# Altium PCB I3_PFE_FULLFILL_SATTLER_IR_2.PCBDOC
Units mm, origin at the board's own origin, x right, y up, seen from the top; angles counter-clockwise.
Board outline 67.8 x 46.5 mm, 2 copper layers (TopLayer, BottomLayer); 24 components, 16 nets, 110 pads, 23 vias.
Unrouted connection lines stored in the file: 35.
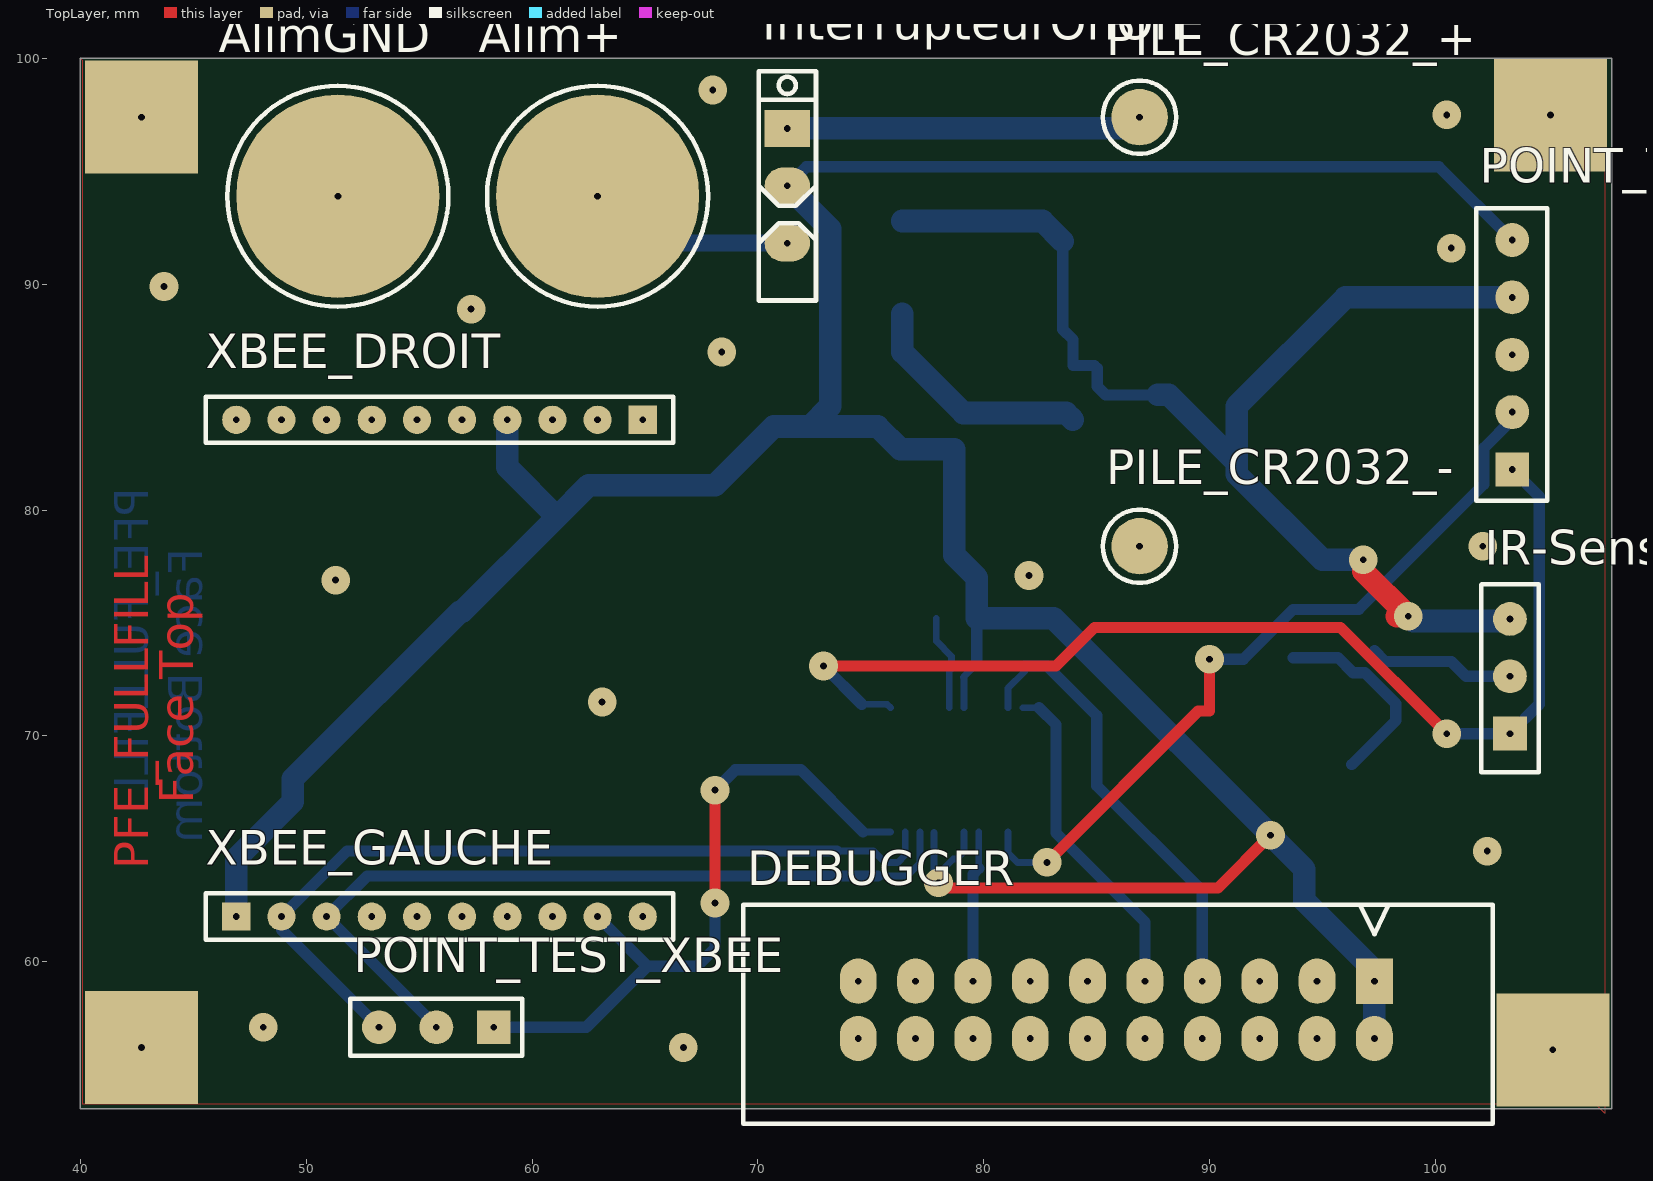
[diagram p0: TopLayer view]
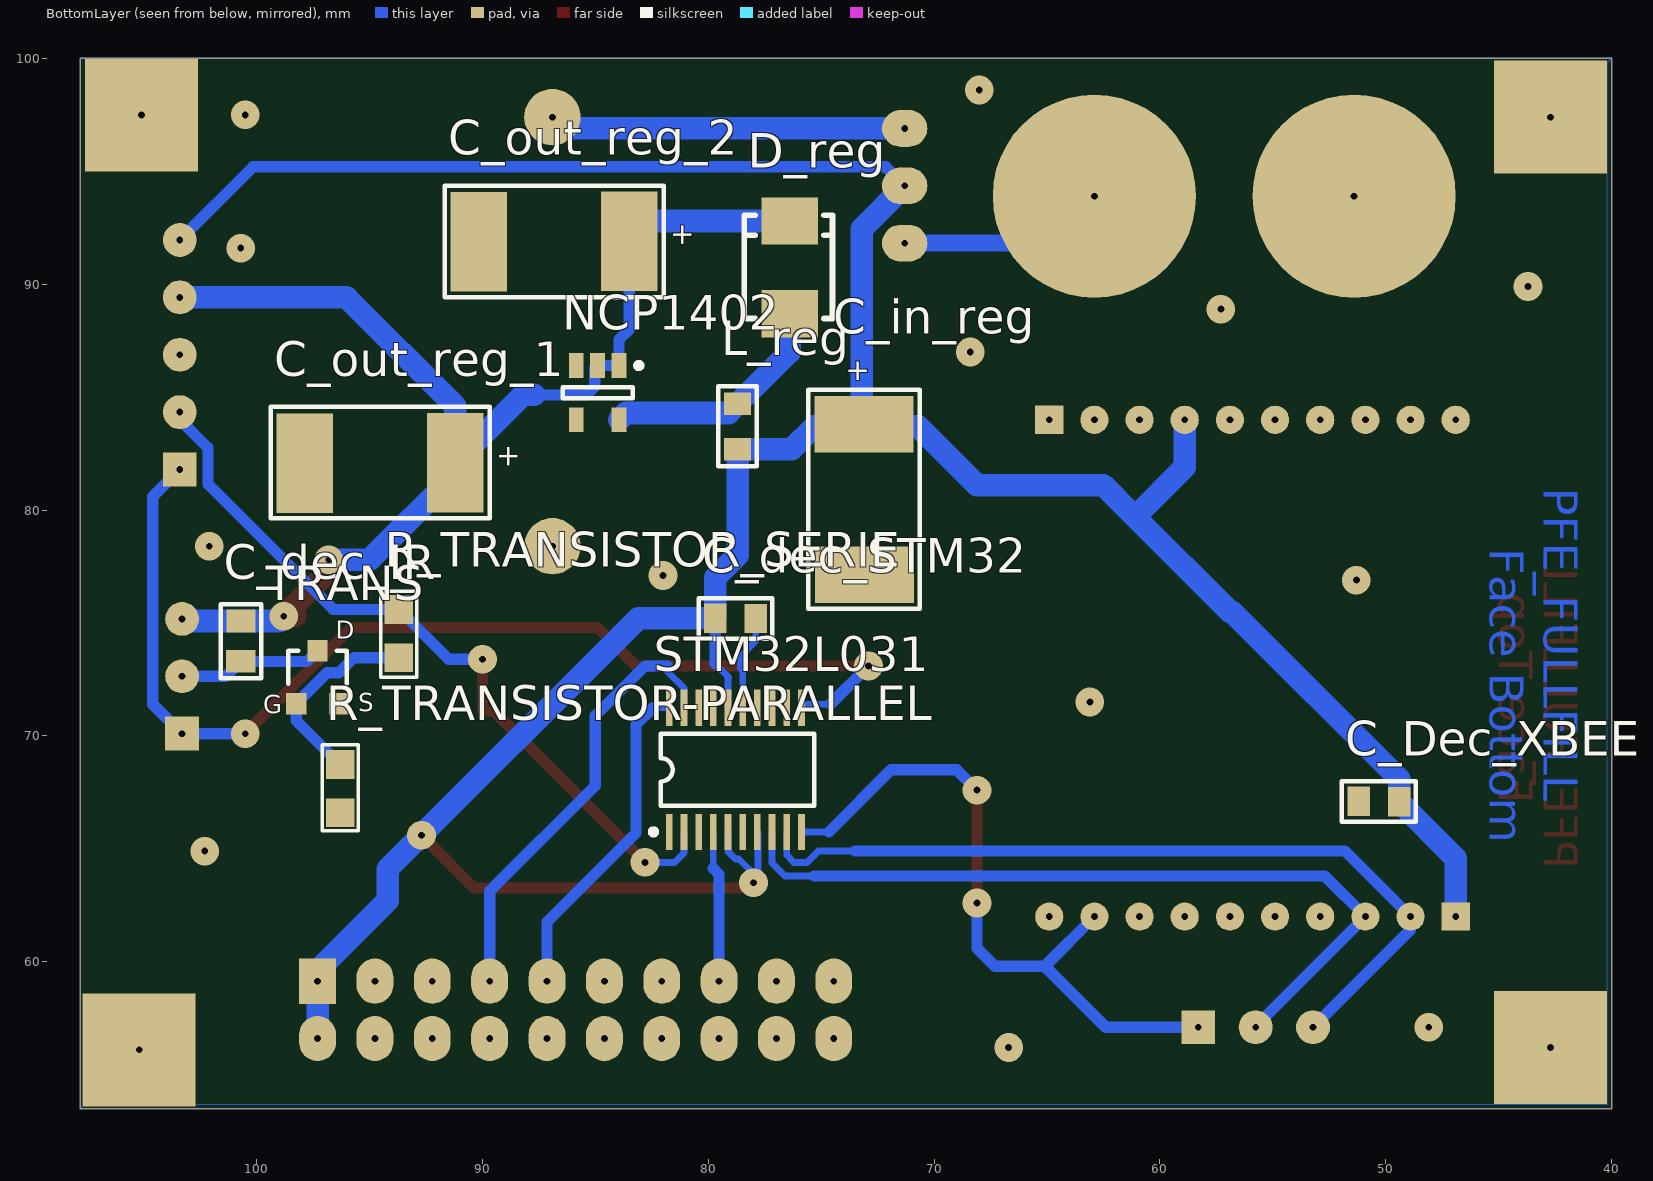
[diagram p1: BottomLayer view, seen from below]
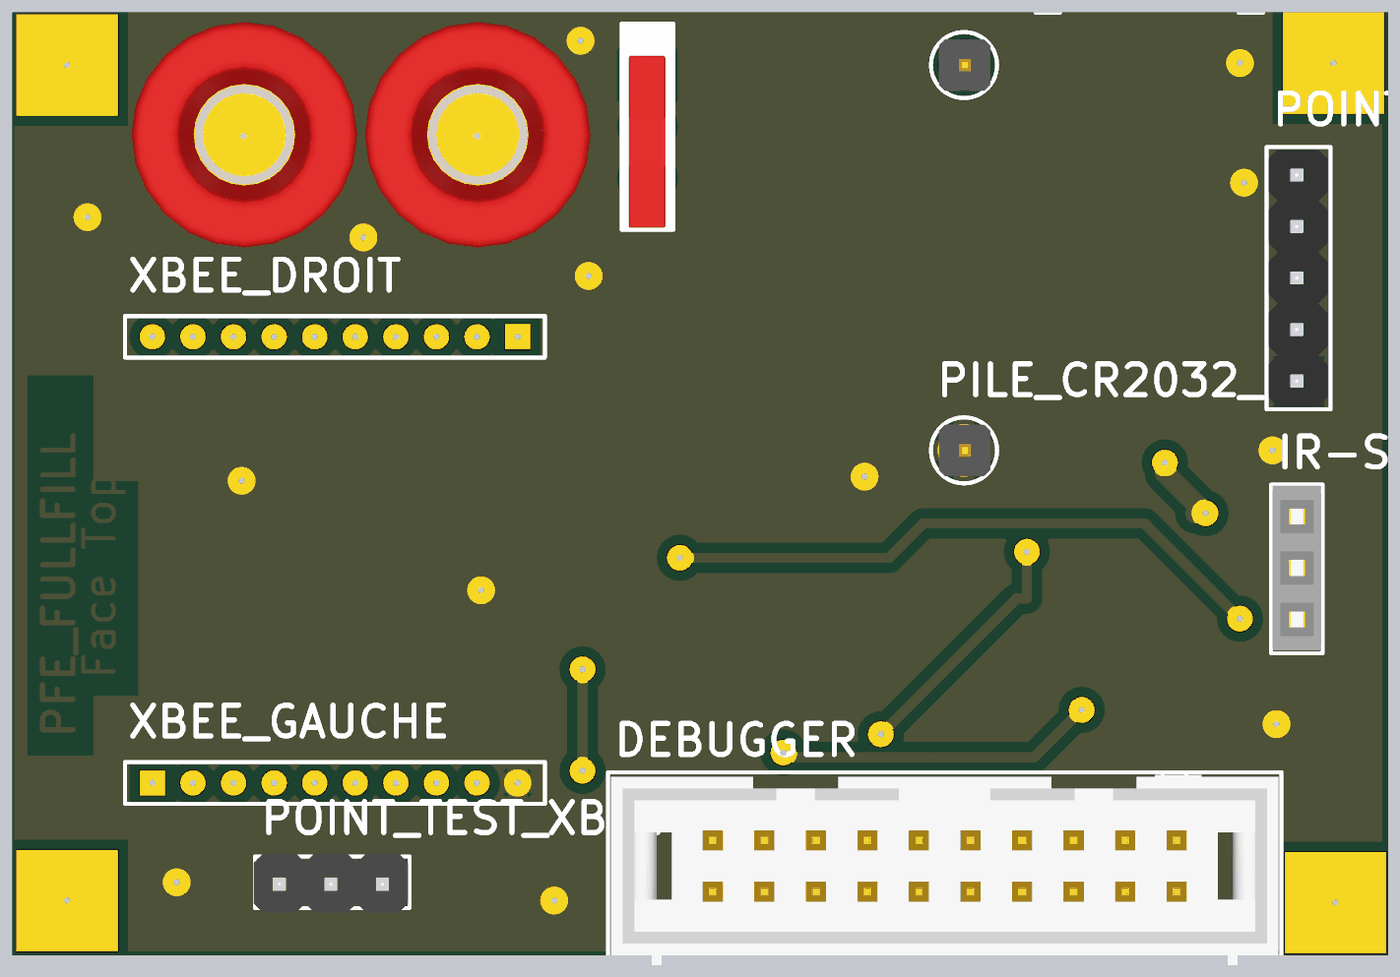
[diagram p2: 3D render of the assembled board from above, using the file's embedded part models]
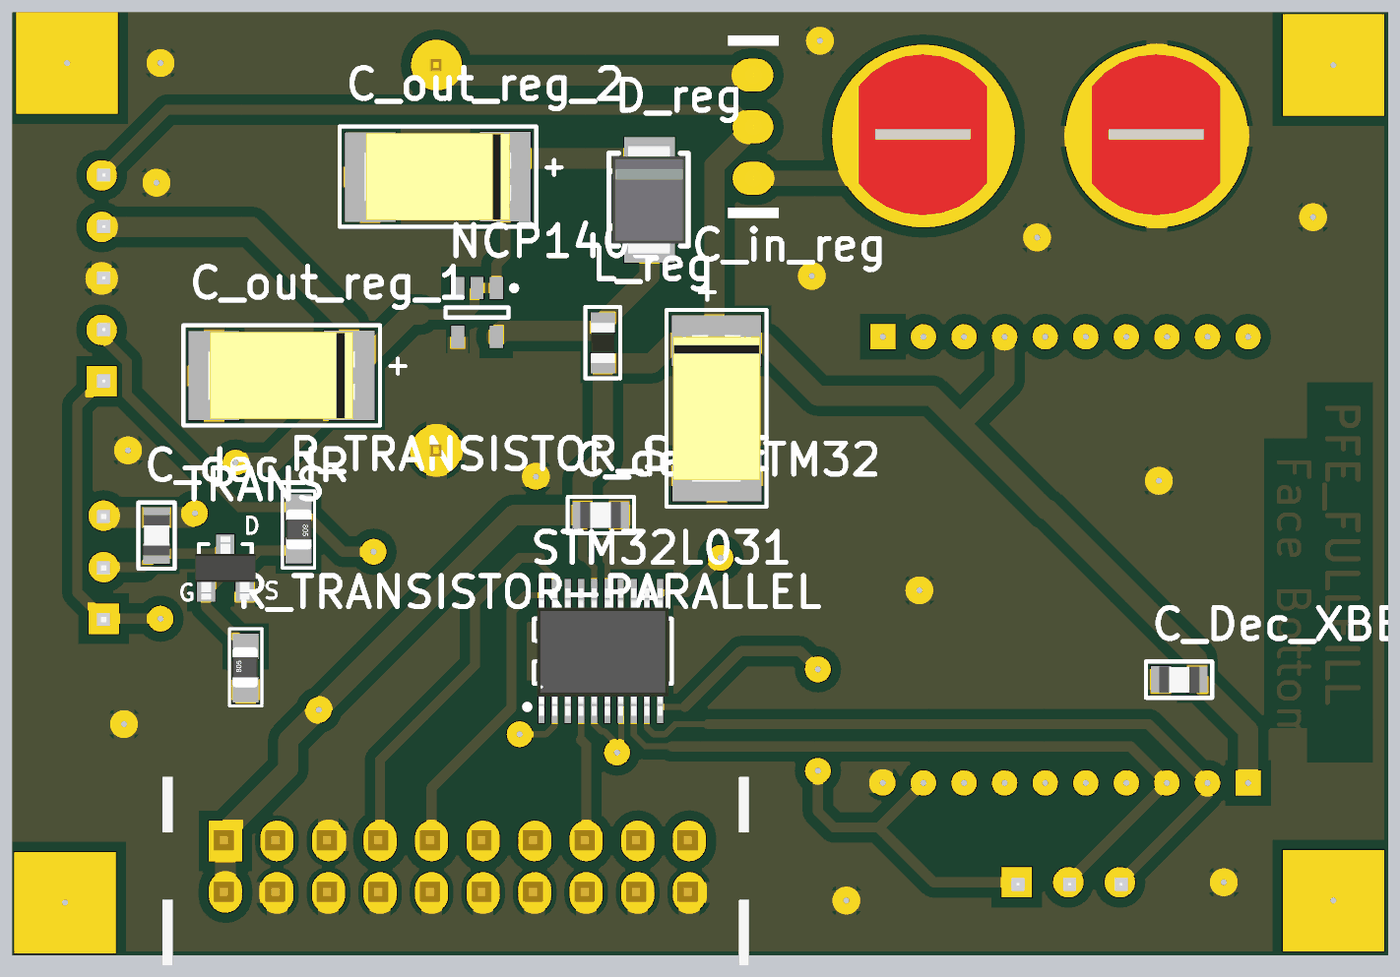
[diagram p3: 3D render of the assembled board from below, using the file's embedded part models]

## Layer stack, top to bottom
TopSolder: solder mask 0.0102, Solder Resist, Dk 3.5
TopLayer: signal copper 0.0356
Dielectric1: core 0.32, FR-4, Dk 4.8
BottomLayer: signal copper 0.0356
BottomSolder: solder mask 0.0102, Solder Resist, Dk 3.5

## Board outline
40,53.5 40,100 107.8,100 107.8,53.5

## Design rules (kind name [scope] priority, off if disabled: settings)
Clearance Clearance_7 [InNamedPolygon('GND-Top')] p1: gap=0.5
Clearance Clearance_6 [InNamedPolygon('GND-Bottom')] p2: gap=0.5
Clearance Clearance_5 [InNamedPolygon('GND-Bottom')] p3: gap=0.5
Clearance Clearance_4 [InNamedPolygon('topGND')] p4 off: gap=0.5
Clearance Clearance_3 [InNamedPolygon('BottomGND')] p5 off: gap=0.5
Clearance Clearance_2 [InNamedPolygon('BottomGND')] p6 off: gap=0.5
Clearance Clearance_1 [InNamedPolygon('BottomGND')] p7 off: gap=0
Clearance [All] p8: gap=0.25
FabricationTestPointUsage TestPointUsage [All] p1: valid=0 allowmultiple=FALSE
FabricationTestpoint Testpoint [All] p1: side=3 testpointundercomponent=TRUE minsize=1.016 maxsize=2.54 preferedsize=1.524 minholesize=0.508 maxholesize=1.016 preferedholesize=0.813 testpointgrid=0.025 allowsidetop=TRUE allowsidebottom=TRUE usegrid=TRUE gridtolerance=0
PlaneConnect [All] p1: planeconnectstyle=Relief reliefexpansion=0.5 reliefentries=4 reliefconductorwidth=1.016 reliefairgap=0.5
PolygonConnect [All] p1: connectstyle=Relief reliefconductorwidth=1.016 reliefentries=4 polygonreliefangle="90 Angle" airgapwidth=0.254
RoutingVias [All] p1: holewidth=0.6 width=1.524 viastyle="Through Hole" minholewidth=0.6 minwidth=1.524 maxholewidth=0.6 maxwidth=1.524
ShortCircuit [All] p1: allowed=TRUE
SilkToSolderMaskClearance SilkscreenOverComponentPads [IsPad] p1: minsilkscreentomaskgap=0.254 clearancetoexposedcopper=TRUE
SolderMaskExpansion [All] p1: expansion=0.051
Width Width_Power [(InNet('GND') OR InNet('+5V')  OR InNet('+3V3') OR InNet('VCC'))] p1: maxlimit=3 minlimit=0.3 preferedwidth=1.5
Width [All] p2: maxlimit=3 minlimit=0.03 preferedwidth=0.5
24 further rules are at their usual default settings.

## Components (designator, comment, footprint, x,y, rotation, side; value= is the part's Value field where it differs from the comment)
Alim+ "DOUILLE BANANE 4mm" DOUILLE_BANANE_4mm 62.9,93.9 r90 top
AlimGND "DOUILLE BANANE 4mm" DOUILLE_BANANE_4mm 51.4,93.9 r90 top
C_dec_IR "CMS_0805" CONDENSATEUR_CMS_0805 100.7,73.3 r90 bottom
C_dec_STM32 "CMS_0805" CONDENSATEUR_CMS_0805 77.9,75.2 r0 bottom
C_Dec_XBEE "CMS_0805" CONDENSATEUR_CMS_0805 51.2,67.1 r180 bottom
C_in_reg "CMS_POLARISE_TANTALE_7343-31" CONDENSATEUR_CMS_POLARISE_TANTALE_D/7343-31 73.1,83.8 r270 bottom
C_out_reg_1 "CMS_POLARISE_TANTALE_7343-31" CONDENSATEUR_CMS_POLARISE_TANTALE_D/7343-31 91.2,82.1 r0 bottom
C_out_reg_2 "CMS_POLARISE_TANTALE_7343-31" CONDENSATEUR_CMS_POLARISE_TANTALE_D/7343-31 83.5,91.9 r0 bottom
D_reg "DIODE_CMS_SCHOTTKY_SMB : MBRS130LT3" DIODE_CMS_SMB 76.4,92.8 r270 bottom
DEBUGGER "HE10/20_MALE_DROIT_BAS_PROFIL" HE10/20_M_D_BP 97.3,56.6 r180 top
InterrupteurOnOff "INTERRUPTEUR_UNIPOLAIRE_DROIT_GLISSIERE" INTER_UNIPOL_DROIT_GLISS 71.3,96.9 r270 top
IR-Sensor "BARRETTE 3 CONTACTS 1 RANGEE FEMELLE DROITE" BARRETTE_3_F_D 103.3,70.1 r90 top
L_reg "INDUCTANCE_CMS_0805" INDUCTANCE_CMS_0805 78.7,82.7 r90 bottom
NCP1402 "MCP73831T-2DCI/OT" SOT-23-OT5_N 84.9,85.2 r270 bottom
PILE_CR2032_+ "POINT_TEST" POINT_TEST 86.9,97.4 r0 top
PILE_CR2032_- "POINT_TEST" POINT_TEST 86.9,78.4 r0 top
POINT_TEST_ALIM_CAPTEUR "BARRETTE_5 CONTACTS_1 RANGEE_MALE_DROITE" BARRETTE_5_M_D 103.4,81.8 r90 top
POINT_TEST_XBEE "BARRETTE 3 CONTACTS 1 RANGEE MALE DROITE" BARRETTE_3_M_D 58.3,57.1 r180 top
R_TRANSISTOR-PARALLEL "RESISTANCE_CMS_0805" RESISTANCE_CMS_0805 96.3,66.6 r90 bottom
R_TRANSISTOR_SERIE "RESISTANCE_CMS_0805" RESISTANCE_CMS_0805 93.7,75.6 r270 bottom
STM32L031 "MSP430F1121AIPW_TSSOP20" TSSOP20_PAS=0.65_LARG=6.4_LONG=6.5 78.8,68.5 r180 bottom
TRANS "TRANSISTOR_MOSFET-N_SOT23_GSD" TRANSISTOR_MOSFET-N_SOT23_GSD 97.3,72.6 r180 bottom
XBEE_DROIT "MMS-110-01-L-SV" SMTC-MMS-110-01-X-SV 64.9,84 r180 top
XBEE_GAUCHE "MMS-110-01-L-SV" SMTC-MMS-110-01-X-SV 46.9,62 r0 top

## Footprints (in the part's own frame and the unit in brackets; to place one, negate y for a bottom-side part, rotate by r counter-clockwise, add the part's x,y. Pads: shape width x height; smd on the part's side, far side on the other; paste and mask are expansions set on the pad)
BARRETTE_3_F_D [mm] "BARRETTE 3 CONTACTS ; 1 RANGEE ; DROITE ; FEMELLE ; ESPACEMENT BROCHES = 2.54 mm"
  rect 1.5x1.5 hole 0.3: 1(0,0)
  round 1.5 hole 0.3: 2(2.54,0) 3(5.08,0)
  silkscreen extent -1.7,-1.27 6.61,1.27, body extent -1.56,-1.21 6.56,1.2, height 8.5
BARRETTE_3_M_D [mm] "BARRETTE 3 CONTACTS ; 1 RANGEE ; DROITE ; MALE ; ESPACEMENT BROCHES = 2.54 mm"
  rect 1.5x1.5 hole 0.3: 1(0,0)
  round 1.5 hole 0.3: 2(2.54,0) 3(5.08,0)
  silkscreen extent -1.27,-1.27 6.35,1.27, body extent -1.21,-1.42 6.41,1.5, height 8.61
BARRETTE_5_M_D [mm] "BARRETTE 5 CONTACTS ; 1 RANGEE ; DROITE ; MALE ; ESPACEMENT BROCHES = 2.54 mm"
  rect 1.5x1.5 hole 0.3: 1(0,0)
  round 1.5 hole 0.3: 2(2.54,0) 3(5.08,0) 4(7.62,0) 5(10.16,0)
  silkscreen extent -1.38,-1.56 11.56,1.59, body extent -1.25,-1.42 11.45,1.5, height 8.51
CONDENSATEUR_CMS_0805 [mm] "CONDENSATEUR CMS 0805 ; DIMENSIONS : 2mm x 1.25mm"
  rect 1x1.3 smd: 1(0,0) 2(1.79,-0.01)
  silkscreen extent -0.74,-0.9 2.53,0.89, body extent -0.09,-0.67 1.91,0.64, height 0.73
CONDENSATEUR_CMS_POLARISE_TANTALE_D/7343-31 [mm] "CONDENSATEUR CMS POLARISE TANTALE BOITIER D ; DIMENSIONS : 7.3mm x 4.3mm"
  rect 2.5x4.4 smd: 1(0,0) 2(6.66,0.02)
  silkscreen extent -1.52,-2.47 8.17,2.47, body extent -0.32,-2.14 6.98,2.16, height 2.81
DIODE_CMS_SMB [mm] "DIODE CMS SMB ; DIMENSIONS : 5.4mm x 3.6mm ; ESPACEMENT BROCHES : 4.15mm"
  rect 2.1x2.5 smd: 1(4.1,0) 2(0,0)
  silkscreen extent -0.25,-2 4.32,1.91, body extent -0.65,-1.82 4.75,1.78, height 2.3
DOUILLE_BANANE_4mm [mm] "DOUILLE BANANE ; DIAMETRE PASSAGE CONTACT = 4 mm ; DIAMETRE PERCAGE = 6 mm"
  round 9 hole 0.3: 1(0,0)
  silkscreen extent -4.89,-4.89 4.89,4.89, body extent -5.5,-5.6 5.63,5.53, height 4.79
HE10/20_M_D_BP [mm] "HE10 ; 20 CONTACTS ; MALE ; DROIT; BAS PROFIL ; ESPACEMENTS BROCHES = 2.54 mm"
  rect 1.63x2 hole 0.3: 1(0,-2.54)
  oval 1.63x2 hole 0.3: 2(0,0) 3(2.54,-2.54) 4(2.54,0) 5(5.08,-2.54) 6(5.08,0) 7(7.62,-2.54) 8(7.62,0) 9(10.16,-2.54) 10(10.16,0) 11(12.7,-2.54) 12(12.7,0) 13(15.24,-2.54) 14(15.24,0) 15(17.78,-2.54) 16(17.78,0) 17(20.32,-2.54) 18(20.32,0) 19(22.86,-2.54) 20(22.86,0)
  silkscreen extent -5.24,-5.93 27.94,3.77, body extent -5.1,-5.8 27.8,3.6, height 8.8
INDUCTANCE_CMS_0805 [mm] "INDUCTANCE CMS 0805 ; DIMENSIONS : 2mm x 1.25mm"
  rect 1x1.2 smd: 1(0,0) 2(2,0)
  silkscreen extent -0.75,-0.85 2.78,0.86, body extent 0,-0.6 2,0.6, height 0.95
INTER_UNIPOL_DROIT_GLISS [mil] "Switch; Slide; SPDT; Pin Spacing=2.54mm"
  rect 64x79 / inner oval 64x79 / far side oval 64x79 hole 11.81: 1(0,0)
  oval 64x79 hole 11.81: 2(100,0) 3(200,0)
  silkscreen extent -100,-50 300,50, body extent -97,-50 297,48, height 291
POINT_TEST [mm] "PASTILLE TRAVERSANTE ; DIAMETRE = 2.5 mm ; DIAMETRE PERCAGE = 1.3 mm"
  round 2.5 hole 0.3: 1(0,0)
  silkscreen extent -1.63,-1.62 1.63,1.62, body extent -1.24,-1.27 1.3,1.27, height 5.94
RESISTANCE_CMS_0805 [mil] "RESISTANCE CMS 0805 ; DIMENSIONS : 2mm x 1.25mm"
  rect 50x50 smd: 1(0,0) 2(84,0)
  silkscreen extent -31,-31 118,31, body extent 4,-24 83,26, height 31
SMTC-MMS-110-01-X-SV [mm] "Through Hole Box Connector Strip Assembly, 1x10 Pins, Vertical, 2mm Pitch, Female"
  rect 1.25x1.25 hole 0.3: 1(0,0)
  round 1.25 hole 0.3: 2(2,0) 3(4,0) 4(6,0) 5(8,0) 6(10,0) 7(12,0) 8(14,0) 9(16,0) 10(18,0)
  silkscreen extent -1.35,-1.02 19.35,1.02, body extent -1.28,-1 19.28,1, height 4.44
SOT-23-OT5_N [mm] "SOT23, 5-Leads, Body 2.9x1.6mm, Pitch 0.95mm, Lead Span 2.7mm, IPC Medium Density"
  rect 1.1x0.65 smd: 1(-1.2,0.95) 2(-1.2,0) 3(-1.2,-0.95) 4(1.2,-0.95) 5(1.2,0.95)
  silkscreen extent -1.32,-1.55 0.25,1.95, body extent -0.9,-1.55 0.9,1.55, height 1.45
TRANSISTOR_MOSFET-N_SOT23_GSD [mm] "SOT23 ; DIMENSIONS : 3.0mm x 2.5 mm"
  rect 0.9x0.95 smd: 1(-0.95,-1.175) 2(0.95,-1.175) 3(0,1.175)
  silkscreen extent -1.3,-0.3 1.3,1.18, body extent -1.5,-1.57 1.5,1.57, height 1.1
TSSOP20_PAS=0.65_LARG=6.4_LONG=6.5 [mm] "Thin Shrink Small Outline Plastic Packages ; 20 Leads ; Body Width = 4.4 mm ; Pitch = 0.65 mm"
  rect 0.3x1.6 smd: 1(-2.925,-2.75) 2(-2.275,-2.75) 3(-1.625,-2.75) 4(-0.975,-2.75) 5(-0.325,-2.75) 6(0.325,-2.75) 7(0.975,-2.75) 8(1.625,-2.75) 9(2.275,-2.75) 10(2.925,-2.75) 11(2.925,2.75) 12(2.275,2.75) 13(1.625,2.75) 14(0.975,2.75) 15(0.325,2.75) 16(-0.325,2.75) 17(-0.975,2.75) 18(-1.625,2.75) 19(-2.275,2.75) 20(-2.925,2.75)
  silkscreen extent -3.75,-2.87 3.5,1.6, body extent -3.15,-3.18 3.35,3.1, height 1.09

## Part data
Alim+ AlimGND: library part DOUILLE_BANANE_4mm, "DOUILLE BANANE 4 mm"
C_dec_IR C_dec_STM32 C_Dec_XBEE: library part CONDENSATEUR_CMS_CER_0805, "CONDENSATEUR CMS CERAMIQUE 0805"
C_in_reg C_out_reg_1 C_out_reg_2: library part CONDENSATEUR_CMS_POL_TANT_D_7343-31, "CONDENSATEUR CMS POLARISE TANTALE BOITIER D/7343-31"
D_reg: "DIODE CMS SCHOTTKY SMB : MBRS130LT3"
DEBUGGER: "EMBASE HE10/20 MALE DROIT BAS PROFIL"
InterrupteurOnOff: "INTERRUPTEUR UNIPOLAIRE DROIT A GLISSIERE"
IR-Sensor: library part "BARRETTE_3 CONTACTS_1 RANGEE_FEMELLE_DROITE"
L_reg: "INDUCTANCE CMS 0805"
NCP1402: "Miniature Single-Cell, Fully Integrated Li-Ion, Li-Polymer Charge Management Controller, 4.2V, 5-Pin SOT-23, Industrial Temperature, Tape and Reel"
PILE_CR2032_+ PILE_CR2032_-: "POINT TEST"
POINT_TEST_ALIM_CAPTEUR: "BARRETTE 5 CONTACTS 1 RANGEE MALE DROITE"
POINT_TEST_XBEE: library part "BARRETTE_3 CONTACTS_1 RANGEE_MALE_DROITE"
R_TRANSISTOR-PARALLEL R_TRANSISTOR_SERIE: "RESISTANCE CMS 0805"
STM32L031: "MICROCONTROLEUR FLASH - 16BITS - TSSOP20"
TRANS: "TRANSISTOR MOSFET CANAL N BOITIER SOT23_GSD"
XBEE_DROIT XBEE_GAUCHE: "Tiger Claw(TM) Socket Strip, Through-hole, Vertical, -55 to 125 degC, 2 mm Pitch, 10-Pin, Female, RoHS"

## Free pads (board coordinates)
  rect 5x5 hole 0.3: 1(42.7,97.4) 2(42.7,56.2) 3(105.2,56.1) 4(105.1,97.5)

## Via types
v1: diameter 1.27, hole 0.3, TopLayer to BottomLayer, 23 vias

## Nets (pads, with @x,y where several pads share a name; then routed paths per layer and width w, separated by ;. In a path a pad name is that pad's centre, name@x,y a point inside that pad or via, vN(x,y) a via of type N, cw(c..) or ccw(c..) an arc to the next point about the centre after c; other vN are vias at no path point)
3V: C_dec_STM32.2 C_Dec_XBEE.2 C_in_reg.1 DEBUGGER.1 DEBUGGER.2 InterrupteurOnOff.2 L_reg.1 POINT_TEST_ALIM_CAPTEUR.5 STM32L031.5 STM32L031.7 STM32L031.16 XBEE_DROIT.4 XBEE_GAUCHE.1 | length 155
  TopLayer w0.5: v1(78,63.5) 78.235,63.265 90.365,63.265 v1(92.7,65.6)
  BottomLayer w0.3: STM32L031.7@77.8,65.725 v1@77.8,63.7 ; v1(78,63.5) 77.8,63.5 v1@77.8,63.7 ; STM32L031.5 79.125,64.884 78.791,64.55 78.65,64.55 v1@77.8,63.7 ; STM32L031.16 79.125,72.575 79.1,72.6 79.69,73.19
  BottomLayer w0.5: InterrupteurOnOff.2 72.14,95.2 100.16,95.2 POINT_TEST_ALIM_CAPTEUR.5 ; 79.69,73.19 C_dec_STM32.2
  BottomLayer w1: XBEE_GAUCHE.1 46.9,64.58 C_Dec_XBEE.2 49.41,68.11 56.8,75.5 56.9,75.5 61.1,79.7 ; XBEE_DROIT.4 58.9,81.9 61.1,79.7 ; InterrupteurOnOff.2 73.2,92.46 73.2,84.6 C_in_reg.1@72.3,83.7 ; DEBUGGER.2 DEBUGGER.1 97.3,59.6 94.2,62.7 94.2,64.1 83.09,75.21 C_dec_STM32.2 79.69,77.01 78.7,78 L_reg.1 76.3,82.7 75.3,83.7 C_in_reg.1@72.3,83.7 ; 61.1,79.7 62.5,81.1 68.1,81.1 70.7,83.7 C_in_reg.1@72.3,83.7
5V: C_dec_IR.2 C_out_reg_1.1 C_out_reg_2.1 D_reg.2 IR-Sensor.3 NCP1402.1 NCP1402.2 POINT_TEST_ALIM_CAPTEUR.4 | length 55.3
  TopLayer w1: v1(96.8,77.8) 96.8,77.3 v1(98.8,75.3) v1@98.3,75.3
  BottomLayer w0.5: C_out_reg_2.1 83.5,88 83.95,87.55 NCP1402.1 NCP1402.2 ; NCP1402.2@85.025,86.275 85.025,85.475 85.4,85.1 87.7,85.1
  BottomLayer w1: D_reg.2 82.6,92.8 C_out_reg_2.1 ; 87.7,85.1 88.2,85.1 C_out_reg_1.1 ; v1(96.8,77.8) 95,77.8 91.2,81.6 C_out_reg_1.1 ; v1(98.8,75.3) 99.01,75.09 C_dec_IR.2 103.21,75.09 IR-Sensor.3 ; POINT_TEST_ALIM_CAPTEUR.4 96.02,89.42 91.2,84.6 C_out_reg_1.1
GND: AlimGND.1 C_dec_STM32.1 C_Dec_XBEE.1 C_in_reg.2 C_out_reg_1.2 C_out_reg_2.2 DEBUGGER.3 DEBUGGER.4 DEBUGGER.5 DEBUGGER.6 DEBUGGER.8 DEBUGGER.10 DEBUGGER.12 DEBUGGER.14 DEBUGGER.16 DEBUGGER.18 DEBUGGER.20 NCP1402.4 PILE_CR2032_-.1 POINT_TEST_ALIM_CAPTEUR.3 R_TRANSISTOR-PARALLEL.1 STM32L031.15 TRANS.2 XBEE_GAUCHE.10 | length 4.3
  BottomLayer w0.3: C_dec_STM32.1 77.9,74.2 78.575,73.525 78.575,72.994 78.475,72.894 STM32L031.15
  other v1: 66.7,56.2 48.1,57.1 102.3,64.9 63.1,71.5 51.3,76.9 82,77.1 102.1,78.4 68.4,87 57.3,88.9 43.7,89.9 100.7,91.6 100.5,97.5 68,98.6
GPIO_SENSOR_IN: POINT_TEST_ALIM_CAPTEUR.2 R_TRANSISTOR_SERIE.1 STM32L031.2 | length 34.2
  TopLayer w0.5: v1(82.8,64.4) 89.5,71.1 90,71.1 v1(90,73.4)
  BottomLayer w0.3: STM32L031.2 81.075,64.825 81.5,64.4 v1(82.8,64.4)
  BottomLayer w0.5: v1(90,73.4) 91.5,73.4 R_TRANSISTOR_SERIE.1 96.6,75.6 102.15,81.15 102.15,82.757 103.4,84.007 POINT_TEST_ALIM_CAPTEUR.2
GPIO_SENSOR_OUT: IR-Sensor.1 POINT_TEST_ALIM_CAPTEUR.1 STM32L031.11 | length 49.5
  TopLayer w0.5: v1(72.9,73.1) 83.2,73.1 84.9,74.8 95.8,74.8 v1(100.5,70.1)
  BottomLayer w0.3: 74.6,71.4 75.725,71.4 STM32L031.11
  BottomLayer w0.5: v1(72.9,73.1) 74.6,71.4 ; v1(100.5,70.1) IR-Sensor.1 104.6,71.4 104.6,80.6 POINT_TEST_ALIM_CAPTEUR.1
NetAlim+_1: Alim+.1 InterrupteurOnOff.3 | length 9.3
  BottomLayer w0.75: Alim+.1 64.98,91.82 InterrupteurOnOff.3
NetC_dec_IR_1: C_dec_IR.1 IR-Sensor.2 TRANS.3 | length 6.5
  BottomLayer w0.5: TRANS.3 97.775,73.3 C_dec_IR.1 101.36,72.64 IR-Sensor.2
NetD_reg_1: D_reg.1 L_reg.2 NCP1402.5 | length 10.5
  BottomLayer w1: D_reg.1 76.4,87 L_reg.2 79.1,84.3 83.65,84.3 NCP1402.5
NetInterrupteurOnOff_1: InterrupteurOnOff.1 PILE_CR2032_+.1 | length 15.8
  BottomLayer w1: InterrupteurOnOff.1 86.4,96.9 PILE_CR2032_+.1
NetR_TRANSISTOR-PARALLEL_2: R_TRANSISTOR-PARALLEL.2 R_TRANSISTOR_SERIE.2 TRANS.1 | length 8.9
  BottomLayer w0.5: R_TRANSISTOR_SERIE.2 95.684,73.466 96.35,72.8 96.875,72.8 TRANS.1 98.25,70.684 R_TRANSISTOR-PARALLEL.2
RESET: DEBUGGER.15 STM32L031.4 | length 6.7
  BottomLayer w0.3: 79.775,64.125 STM32L031.4
  BottomLayer w0.5: DEBUGGER.15 79.52,63.87 79.775,64.125
SWCLK: DEBUGGER.9 STM32L031.20 | length 14.8
  BottomLayer w0.3: STM32L031.20 82.45,71.25
  BottomLayer w0.5: 82.45,71.25 83.2,70.5 83.2,65.7 87.14,61.76 DEBUGGER.9
SWDIO: DEBUGGER.7 STM32L031.19 | length 20
  BottomLayer w0.3: STM32L031.19 81.075,72.116 81.8,72.841 81.8,73.1
  BottomLayer w0.5: 81.8,73.1 82.8,73.1 85,70.9 85,67.8 89.68,63.12 DEBUGGER.7
UART_XBEE_RX: POINT_TEST_XBEE.2 STM32L031.8 XBEE_GAUCHE.3 | length 35.5
  BottomLayer w0.3: 75.3,63.8 76.6,63.8 77.175,64.375 STM32L031.8
  BottomLayer w0.5: POINT_TEST_XBEE.2 55.76,57.14 XBEE_GAUCHE.3 52.7,63.8 75.3,63.8
UART_XBEE_TX: POINT_TEST_XBEE.3 STM32L031.9 XBEE_GAUCHE.2 | length 36.8
  BottomLayer w0.3: 73.5,64.9 75.119,64.9 75.619,64.4 76.2,64.4 76.525,64.725 ; 76.525,64.784 STM32L031.9
  BottomLayer w0.5: POINT_TEST_XBEE.3 48.9,61.42 XBEE_GAUCHE.2 51.8,64.9 73.5,64.9
XBEE_SLEEP_RQ: POINT_TEST_XBEE.1 STM32L031.10 XBEE_GAUCHE.9 | length 30.6
  TopLayer w0.5: v1@68.1,62.4 v1(68.1,67.6)
  BottomLayer w0.3: 74.65,65.75 STM32L031.10
  BottomLayer w0.5: POINT_TEST_XBEE.1 62.4,57.1 65.1,59.8 ; XBEE_GAUCHE.9 65.1,59.8 ; v1@68.1,62.4 68.1,60.6 67.3,59.8 65.1,59.8 ; v1(68.1,67.6) 69,68.5 71.9,68.5 74.65,65.75
  other v1: 68.1,62.6
pads on no net: DEBUGGER.11 DEBUGGER.13 DEBUGGER.17 DEBUGGER.19 NCP1402.3 STM32L031.1 STM32L031.3 STM32L031.6 STM32L031.12 STM32L031.13 STM32L031.14 STM32L031.17 STM32L031.18 XBEE_DROIT.1 XBEE_DROIT.2 XBEE_DROIT.3 XBEE_DROIT.5 XBEE_DROIT.6 XBEE_DROIT.7 XBEE_DROIT.8 XBEE_DROIT.9 XBEE_DROIT.10 XBEE_GAUCHE.4 XBEE_GAUCHE.5 XBEE_GAUCHE.6 XBEE_GAUCHE.7 XBEE_GAUCHE.8

## Polygon pours and split planes (outlines as drawn)
GND on BottomLayer "GND-Bottom" (solid, remove dead copper, shelved, pour order 8): 40,100 107.8,100 107.8,53.5 107.6,53.7 40.2,53.7 40.2,99.8 40,100
GND on TopLayer "GND-Top" (solid, remove dead copper, shelved, pour order 6): 40,100 107.5,100 107.5,53.3 107.1,53.7 40.1,53.7 40.1,99.9 40,100

## Other copper
TopLayer:
  text "Face Top" at 45,67 h1.5 r90
  text "PFE_FULLFILL" at 43,64.1 h1.5 r90
BottomLayer:
  text "PFE_FULLFILL" at 43,81 h1.5 r90
  text "Face Bottom" at 45.4,78.3 h1.5 r90

## Silkscreen, mask and mechanical layers (free items; w line width, h text height)
Mechanical15:
  the board outline again, w0.254

## Text inside footprints (layer, text, board x,y; h text height)
C_in_reg: BottomOverlay "+" at 72.83,86.57 h0.95 r180
C_out_reg_1: BottomOverlay "+" at 88.43,81.83 h0.95 r270
C_out_reg_2: BottomOverlay "+" at 80.73,91.63 h0.95 r270
TRANS: BottomOverlay "D" at 96.5,74.3 h0.8; BottomOverlay "S" at 95.5,71.1 h0.8; BottomOverlay "G" at 99.7,71 h0.8